# Altium PCB MainPCBV6.PcbDoc (part 2 of 5)
Units mm, origin at the board's own origin, x right, y up, seen from the top; angles counter-clockwise.
Board outline 176 x 144.01 mm, 2 copper layers (Top Layer, Bottom Layer); 220 components, 240 nets, 911 pads, 254 vias.
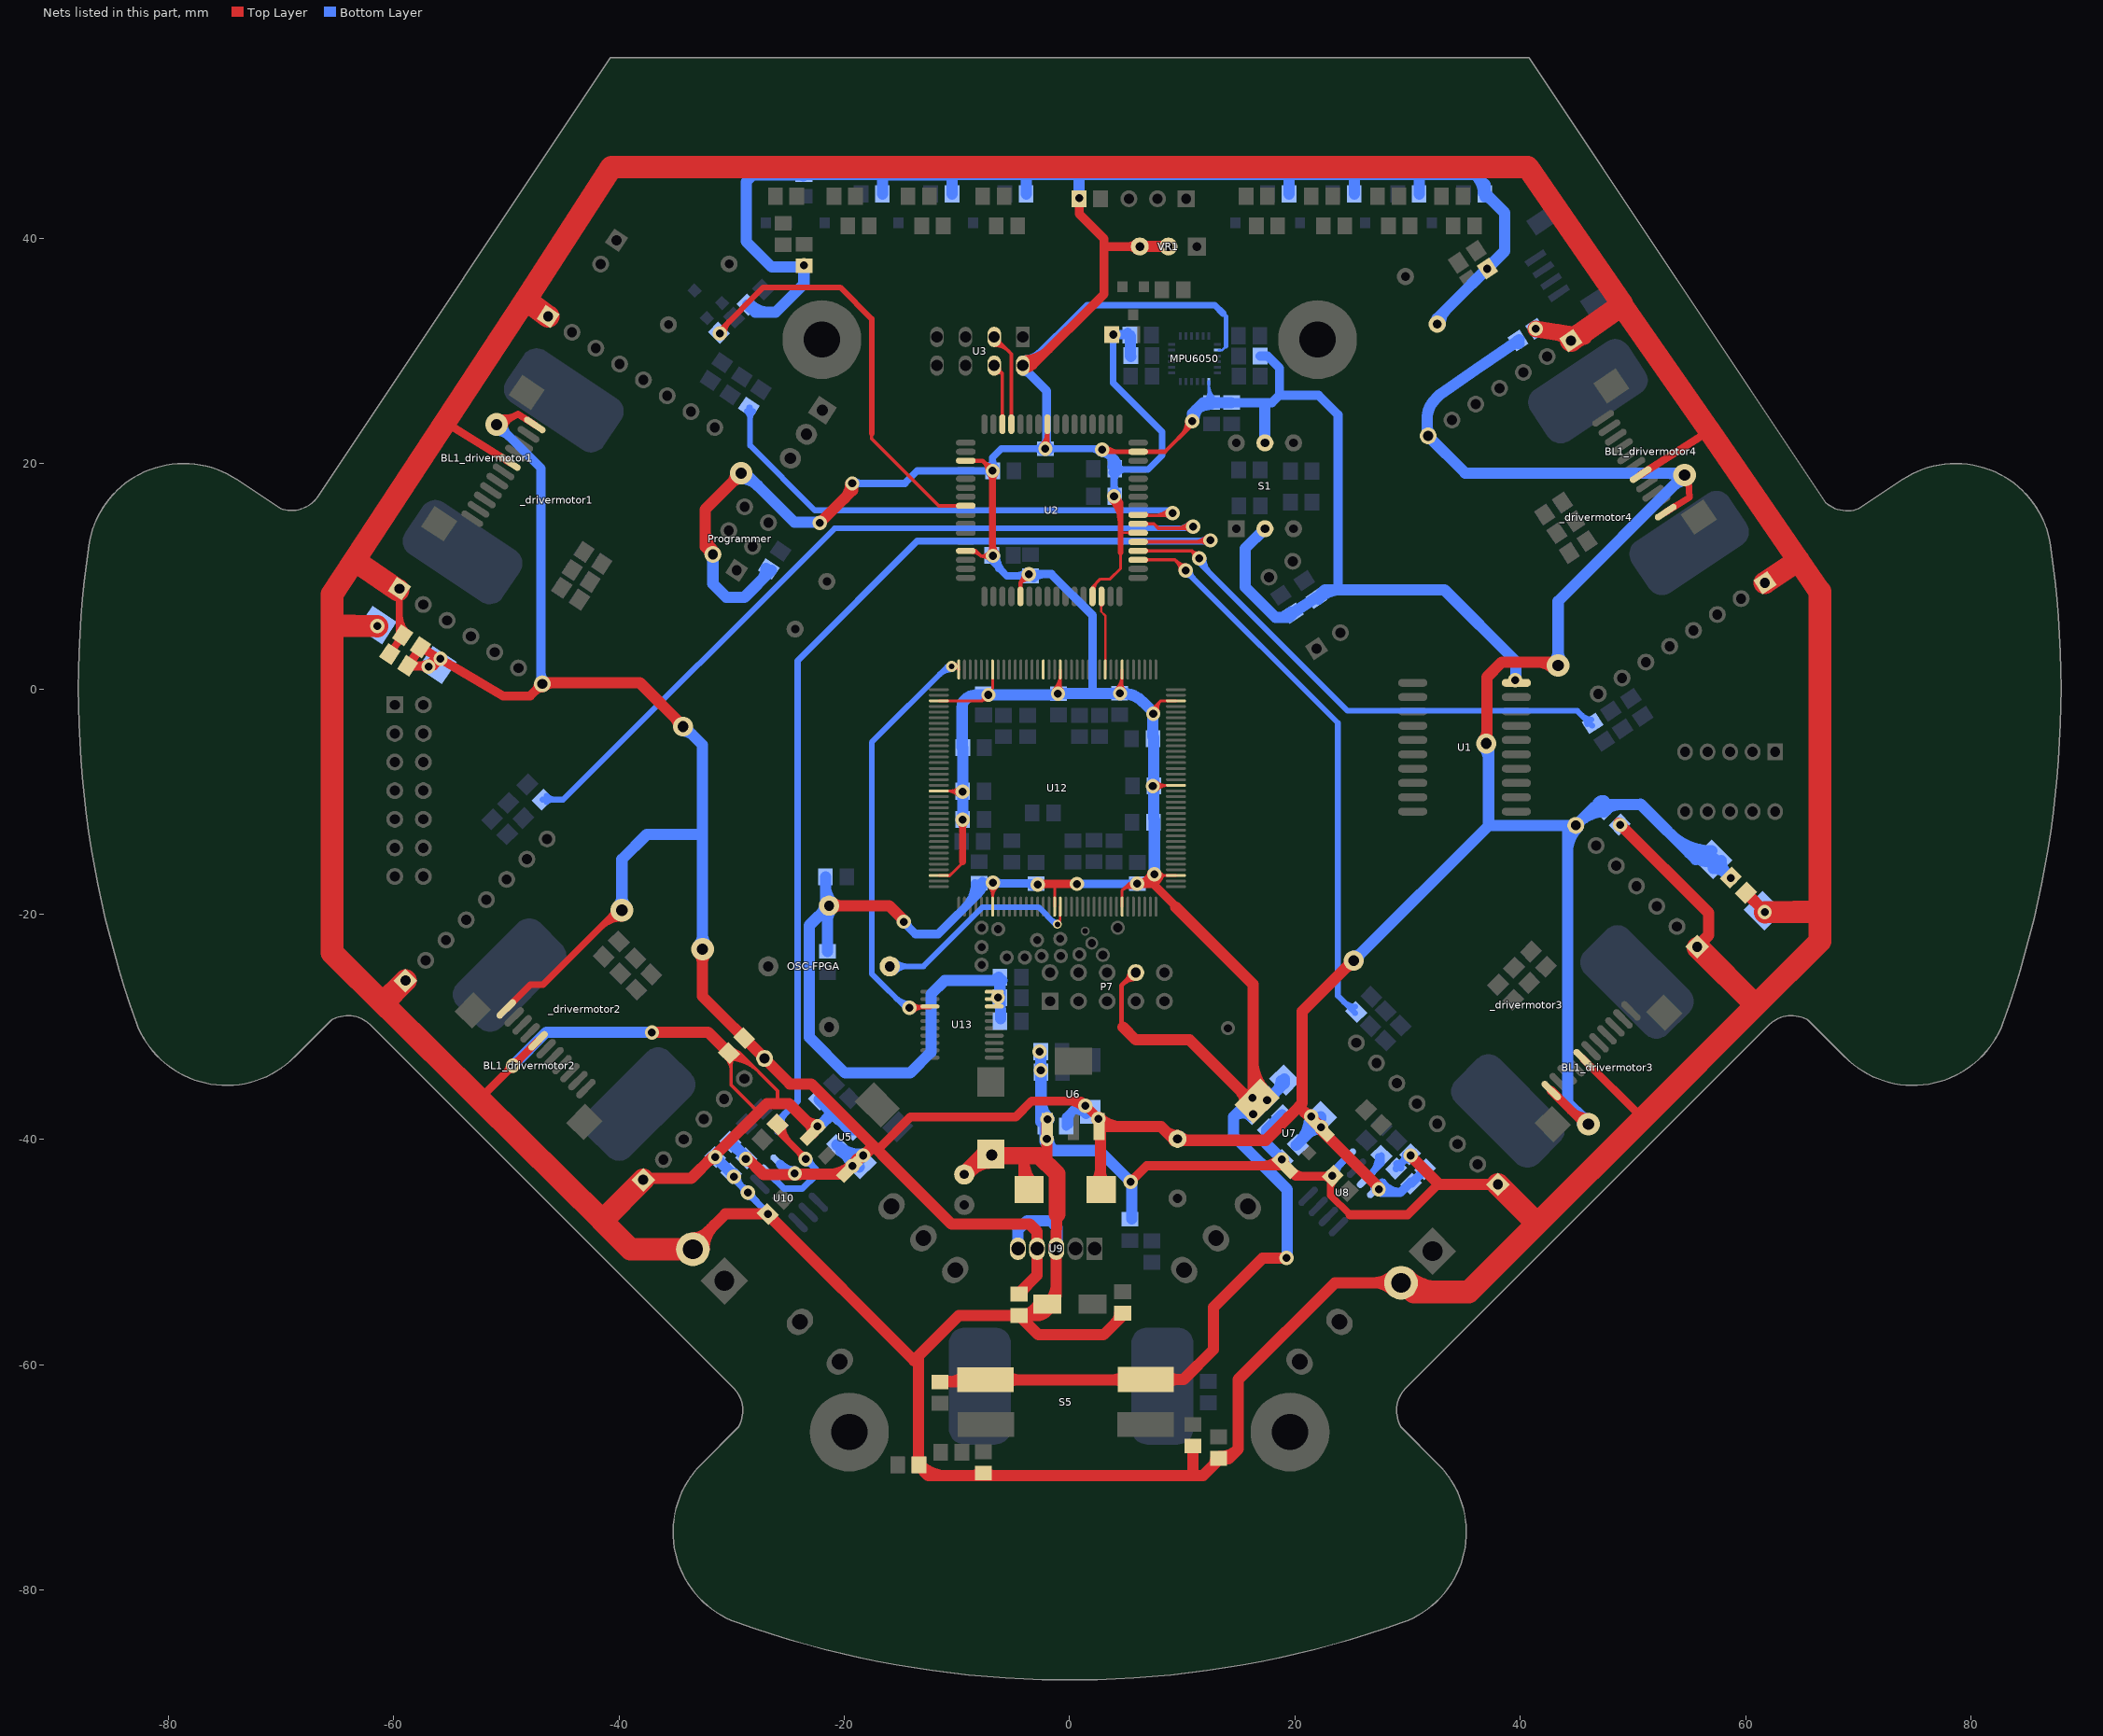
[diagram p2: the nets of this part, all layers, seen from the top]

## Via types
v1: diameter 1.27, hole 0.711, Top Layer to Bottom Layer, 214 vias
v2: diameter 1, hole 0.5, Top Layer to Bottom Layer, 17 vias
v3: diameter 2, hole 1, Top Layer to Bottom Layer, 11 vias
v4: diameter 0.8, hole 0.5, Top Layer to Bottom Layer, 8 vias
v5: diameter 1.778, hole 0.965, Top Layer to Bottom Layer, 3 vias
v6: diameter 0.75, hole 0.5, Top Layer to Bottom Layer, 1 vias

## Nets (pads, with @x,y where several pads share a name; then routed paths per layer and width w, separated by ;. In a path a pad name is that pad's centre, name@x,y a point inside that pad or via, vN(x,y) a via of type N, cw(c..) or ccw(c..) an arc to the next point about the centre after c; other vN are vias at no path point) (continued)
3.3V: C3.2 C18.2 C19.2 C27.2 C29.1 C32.2 C33.1 C39.2 C40.2 C41.2 C42.2 C43.2 C44.2 C45.2 C46.2 C47.2 C48.2 C49.2 C50.2 C56.2 C57.2 C58.2 C101.2 C102.2 C103.2 C104.2 C105.2 C106.2 D6.1 MPU6050.8 MPU6050.13 OSC-FPGA.4 P7.8 Programmer.2 R2.1 R7.1 R14.1 R15.1 R17_LED1.2 R17_LED2.2 R17_LED3.2 R17_LED4.2 R17_LED5.2 R17_LED6.2 R17_LED7.2 R24.1 R25.1 R27.1 R28.2 R30.2 R31.2 R32.2 R33.2 S1.2 S1.5 S2.2 S5.2 U1.20 U2.6 U2.15 U2.25 U2.35 U2.45 U2.53 U2.61 U3.2 U7.4 U12.3 U12.19 U12.34 U12.43 U12.54 U12.66 U12.75 U12.91 U12.106 U12.115 U12.126 U12.138 U13.18 U13.19 U13.20 VR1.2 VR1.3 | length 812.8
  Top Layer w0.2: 4.512,13.767 4.594,13.85 U2.6@6.075,13.85 ; U2.6@5.351,13.726 ccw(c5.053,13.427) 5.053,13.85 ccw(c5.053,14.272) U2.6@5.351,13.973
  Top Layer w0.254: U12.106@-11.617,-16.564 -10.62,-16.564 ; U12.91@-11.617,-9.064 -9.59,-9.064 v1(-9.51,-9.144) ; U12.75@-11.617,-1.064 -7.769,-1.064 ; U12.91@-10.93,-9.064 cw(c-10.93,-10.564) v1@-9.869,-9.503 ; U12.106@-10.855,-16.565 ccw(c-10.738,-16.446) -10.62,-16.564 ; U12.106@-10.853,-16.566 ccw(c-10.853,-16.008) -10.459,-16.402 ; -10.543,-9.064 ccw(c-10.543,-8.111) v1@-9.869,-8.785 ; -10.317,-9.064 cw(c-10.317,-9.951) v1@-9.689,-9.324 ; -9.51,-15.357 -9.461,-15.405 -10.62,-16.564 ; v1@-7.691,-0.708 cw(c-8.009,-0.824) -7.769,-1.064 ; v1@-7.62,-0.914 -7.769,-1.064 ; v1@-7.419,-0.998 ccw(c-7.546,-1.287) -7.769,-1.064 ; v1@-7.166,-17.58 cw(c-7.949,-18.363) -6.842,-18.363 ; U12.115@-6.842,-19.339 v1@-6.842,-17.393 ; U12.115@-6.842,-18.532 cw(c-5.496,-18.532) v1@-6.448,-17.58 ; -6.842,-17.919 cw(c-6.109,-17.919) v1@-6.628,-17.401 ; -6.842,0.041 U12.66@-6.842,1.711 ; v1@-1.401,-0.062 ccw(c-2.758,1.295) U12.54@-0.838,1.295 ; U12.126@-1.342,-19.339 -1.342,-17.38 cw(c-1.27,-17.38) -1.314,-17.323 ; v1@-1.221,-0.242 ccw(c-2.145,0.682) -0.838,0.682 ; v1(-1.041,-0.422) -0.95,-0.422 -0.838,-0.533 -0.838,1.707 U12.54@-0.842,1.711 ; -0.838,0.314 ccw(c-0.306,0.314) v1@-0.682,-0.062 ; U2.61@2.025,8.2 2.025,9.061 2.718,9.754 3.594,9.754 4.512,10.672 4.512,12.09 ; U2.61@2.173,8.8 cw(c3.162,8.8) 2.463,9.498 ; v1@4.111,-0.047 ccw(c2.792,1.272) U12.43@4.658,1.272 ; v1@4.291,-0.227 ccw(c3.405,0.659) 4.658,0.659 ; U12.138@4.658,-19.339 4.658,-17.882 4.674,-17.882 ; v1@4.658,-0.336 U12.43@4.658,1.711 ; 4.658,0.368 ccw(c5.244,0.368) v1@4.83,-0.047 ; 4.906,-17.649 cw(c5.465,-18.209) v1@5.866,-17.527 ; 5.138,-17.417 cw(c5.637,-17.916) 5.994,-17.308 5.984,-17.297 5.258,-17.297 ; v1@5.516,-17.479 ccw(c5.258,-17.572) 5.258,-17.297 ; v1@5.523,-17.118 cw(c5.258,-17.012) 5.258,-17.297 ; v1@5.737,-17.746 ccw(c5.293,-18.501) 4.674,-17.882 ; v1@7.391,-1.753 8.08,-1.064 ; v1@7.405,-16.564 U12.3@9.433,-16.564 ; v1@7.421,-8.564 U12.19@9.433,-8.564 ; v1@7.556,-8.816 cw(c8.164,-9.424) 8.164,-8.564 ; v1@7.652,-2.114 cw(c8.318,-1.843) 7.81,-1.334 ; v1@7.735,-8.995 cw(c8.777,-10.037) U12.19@8.777,-8.564 ; v1@7.735,-8.277 ccw(c8.428,-7.584) 8.428,-8.564 ; v1@7.887,-2.018 cw(c8.703,-1.686) 8.08,-1.064 ; U12.34@9.433,-1.064 8.08,-1.064 ; 4.674,-17.882 5.258,-17.297
  Top Layer w0.305: U2.45@-9.225,12.25 -9.206,12.268 -8.357,12.268 -7.874,11.786 ; U2.45@-8.625,12.127 cw(c-8.625,11.139) -7.926,11.838 ; v1@-7.182,12.115 cw(c-7.874,12.677) -7.874,11.786 ; v1@-7.157,11.478 ccw(c-7.874,10.795) -7.874,11.786 ; v1@-6.833,11.786 -7.874,11.786
  Top Layer w0.381: U2.35@-9.225,20.25 -7.738,20.25 v1(-6.843,19.355) ; v1@-7.287,19.355 ccw(c-8.36,19.355) -7.602,20.114 ccw(c-6.843,20.872) v1@-6.843,19.799 ; U2.53@-4.375,8.2 -4.375,9.443 ; v1@-4.077,10.179 cw(c-5.095,10.163) -4.375,9.443 ; v1@-3.639,9.741 ccw(c-3.655,8.723) -4.375,9.443 ; v1(-3.632,10.185) -4.375,9.443 ; v1@-2.473,21.635 ccw(c-3.677,22.839) U2.25@-1.975,22.839 ; v1(-2.159,21.321) -1.975,21.505 U2.25@-1.975,23.5 ; -1.975,21.949 ccw(c-1.531,21.949) v1@-1.845,21.635 ; v1(2.87,21.234) 3.055,21.05 U2.15@6.075,21.05 8.451,21.05 v1@10.744,23.343 ; v1@3.185,20.92 cw(c3.497,20.607) 3.497,21.05 ; v1@3.185,21.549 ccw(c4.389,22.754) 4.389,21.05 ; 9.897,22.495 ccw(c8.618,23.774) v1@10.427,23.774 ; 10.547,23.146 ccw(c9.919,23.774) v1@10.808,23.774 ; v1@10.947,23.343 v1@10.947,23.698
  Top Layer w0.4: 4.712,-26.226 cw(c5.867,-27.381) P7.8@5.867,-25.747 ; 4.724,-30.023 4.597,-29.896 4.597,-26.34 P7.8@5.791,-25.146 ; 5.018,-25.919 ccw(c4.296,-25.197) P7.8@5.317,-25.197
  Top Layer w0.508: v1@3.668,16.825 cw(c1.63,14.787) 4.512,14.787 ; v1(3.937,17.094) 4.512,16.52 ; v1@3.972,16.715 cw(c4.034,16.042) 4.512,16.52 ; v1@4.027,17.184 cw(c2.856,16.014) 4.512,16.014 ; v1@4.316,17.059 ccw(c4.99,16.998) 4.512,16.52 ; 4.512,12.09 4.512,13.767 4.512,16.52
  Top Layer w0.635: v1@-9.734,-11.832 cw(c-10.276,-12.374) -9.51,-12.374 cw(c-8.743,-12.374) v1@-9.285,-11.832 ; -9.51,-15.357 v1(-9.51,-11.608) ; v1@-7.067,19.13 cw(c-7.609,18.588) -6.843,18.588 cw(c-6.076,18.588) v1@-6.618,19.13 ; v1@-7.032,12.036 ccw(c-7.488,12.492) -6.843,12.492 ; -6.843,12.663 ccw(c-5.955,12.663) v1@-6.583,12.036 ; v1(-6.843,19.355) -6.843,12.04 -7.071,11.811 v1(-6.807,11.811)
  Top Layer w0.75: v1@-3.048,-17.384 -2.987,-17.323 -1.314,-17.323 v1(0.635,-17.323) ; v1@-2.661,-17.557 cw(c-2.094,-18.124) -2.094,-17.323 ; 7.026,-17.308 ccw(c7.026,-16.3) v1@7.985,-16.61 ; v1@7.271,-16.379 cw(c5.994,-15.966) 5.994,-17.308 7.402,-17.308 ; 7.402,-17.316 cw(c8.303,-17.316) v1@7.694,-16.651 ; v1@7.402,-16.561 7.402,-17.308 ; 9.423,-19.38 9.423,-19.329 7.402,-17.308
  Top Layer w0.8: U3.2@-4.166,28.402 ccw(c-4.166,29.763) -3.203,28.801 ; U3.2@-4.166,28.702 -3.302,28.702 3.048,35.052 ; U3.2@-4.166,29.202 ccw(c-4.166,32.494) -1.838,30.166 ; R15.1@0.838,43.409 0.838,42.164 3.048,39.954 3.048,39.192 ; 3.048,35.128 3.048,39.192 ; VR1.3@5.94,38.986 ccw(c5.257,38.303) 5.257,39.268 ccw(c5.257,40.234) VR1.3@5.94,39.551 ; VR1.3@6.198,39.319 VR1.3@6.248,39.268 ; VR1.3@6.223,39.268 3.124,39.268 3.048,39.192
  Top Layer w1: -32.36,14.181 ccw(c-29.421,14.181) Programmer.2@-31.499,12.103 ; Programmer.2@-31.676,11.926 -32.36,12.61 -32.36,15.926 v3@-29.21,19.075 ; -30.031,18.255 ccw(c-30.928,19.152) v3@-29.659,19.152 ; -29.969,18.316 cw(c-29.159,17.506) v3@-29.159,18.652 ; v1(-22.174,14.732) -19.279,17.628 v1@-19.279,18.288 ; OSC-FPGA.4@-21.361,-19.25 -16.031,-19.25 v1@-14.656,-20.625 ; OSC-FPGA.4@-21.079,-19.533 cw(c-20.396,-20.216) -20.396,-19.25 cw(c-20.396,-18.284) OSC-FPGA.4@-21.079,-18.967 ; -19.983,16.923 ccw(c-21.298,18.237) v1@-19.439,18.237 ; C27.2@-11.506,-61.534 -7.813,-61.534 S5.2@-7.772,-61.493 ; C27.2@-11.331,-61.404 ccw(c-10.874,-60.613) -10.638,-61.495 ; C27.2@-10.782,-61.534 ccw(c-10.782,-59.427) S5.2@-9.292,-60.917 ; S5.2@-7.468,-61.341 6.934,-61.341 S5.2@6.96,-61.316 ; S5.2@-5.643,-61.765 cw(c-4.619,-62.79) -4.619,-61.341 cw(c-4.619,-59.892) S5.2@-5.643,-60.917 ; 3.847,-61.341 ccw(c3.847,-59.806) S5.2@4.932,-60.891 ; 3.969,-61.341 cw(c3.969,-62.703) S5.2@4.932,-61.74 ; 4.724,-30.023 5.867,-31.166 10.643,-31.166 U7.4@16.29,-36.813 ; VR1.3@6.248,39.268 VR1.2@8.763,39.268 ; S5.2@6.756,-61.316 S5.2@6.96,-61.316 ; S5.2@8.581,-61.74 cw(c9.605,-62.764) 9.605,-61.316 cw(c9.605,-59.867) S5.2@8.581,-60.891 ; 9.423,-19.38 16.281,-26.238 U7.4@16.281,-35.839 ; 15.034,-35.558 cw(c13.664,-36.928) U7.4@15.602,-36.928 ; 15.22,-35.743 ccw(c16.231,-34.732) U7.4@16.231,-36.162 ; 15.283,-35.806 ccw(c16.302,-34.787) U7.4@16.302,-36.228 ; 15.286,-35.78 ccw(c16.067,-35.203) U7.4@16.211,-36.163 ; 15.368,-35.892 cw(c13.49,-37.77) U7.4@16.146,-37.77 ; 16.281,-33.015 ccw(c20.215,-33.015) U7.4@17.434,-35.797 ; v1@19.177,-50.546 17.12,-50.546 12.776,-54.889 12.776,-58.649 10.109,-61.316 S5.2@6.96,-61.316
  Bottom Layer w0.2: MPU6050.8@13.233,30.074 13.538,30.074 13.868,30.404
  Bottom Layer w0.254: C32.2@12.129,25.78 ccw(c11.637,26.272) 12.332,26.272 ; C32.2@12.332,25.575 MPU6050.13@12.332,27.287 ; 12.332,26.46 ccw(c13.549,26.46) C32.2@12.689,25.6 ; MPU6050.13@12.332,27.074 ccw(c14.162,27.074) C32.2@12.868,25.78 ; C29.1@14.212,25.575 C29.1@14.376,25.41
  Bottom Layer w0.4: v1@-14.884,-20.625 v1@-14.757,-20.752 ; 13.614,33.325 13.868,33.071 13.868,30.404
  Bottom Layer w0.508: C29.1@14.341,25.41 C29.1@14.376,25.41
  Bottom Layer w0.6: U3.2@-4.166,29.302 ccw(c-4.166,31.548) -2.578,29.96 ; U3.2@-3.835,28.702 1.524,34.061 12.878,34.061 13.614,33.325 ; v1@3.624,31.208 cw(c3.052,30.636) 3.861,30.636 cw(c4.67,30.636) v1@4.098,31.208 ; v1(3.861,31.445) 3.861,27.153 8.204,22.809 8.204,20.726 6.96,19.482 C105.2@4.14,19.482 ; C105.2@4.245,19.185 cw(c4.962,18.469) 4.962,19.482 ; C105.2@4.245,19.68 ccw(c4.724,20.159) 4.724,19.482
  Bottom Layer w0.635: v1@-19.355,18.237 v1(-19.304,18.237) -14.63,18.237 -13.513,19.355 v1(-6.843,19.355) -6.843,20.538 -6.06,21.321 v1(-2.159,21.321) 2.758,21.321 v1@2.921,21.158 ; v1@-19.079,18.013 cw(c-18.537,17.471) -18.537,18.237 cw(c-18.537,19.004) v1@-19.079,18.462 ; C106.2@-7.081,11.538 -5.566,10.023 C102.2@-3.48,10.023 ; C103.2@-7.078,19.12 ccw(c-7.646,18.552) -7.646,19.355 ccw(c-7.646,20.158) C103.2@-7.078,19.59 ; C103.2@-7.078,19.69 ccw(c-7.646,20.258) -6.843,20.258 ccw(c-6.04,20.258) C103.2@-6.608,19.69 ; C103.2@-7.067,19.13 ccw(c-7.609,18.588) -7.609,19.355 ccw(c-7.609,20.121) -7.067,19.579 ccw(c-7.609,20.121) -6.843,20.121 ccw(c-6.076,20.121) C103.2@-6.618,19.579 ; C106.2@-6.966,11.536 cw(c-7.68,10.299) -6.3,10.669 ; C106.2@-6.587,11.736 ccw(c-4.914,11.736) -6.097,10.553 ; C106.2@-6.49,11.811 ccw(c-4.403,11.811) -5.879,10.335 ; -4.791,10.023 ccw(c-4.791,11.344) C102.2@-3.857,10.41 ; C102.2@-3.815,9.788 ccw(c-4.383,9.22) -4.383,10.023 ccw(c-4.383,10.826) C102.2@-3.815,10.258 ; C104.2@-2.494,21.086 ccw(c-3.062,20.518) -3.062,21.321 ccw(c-3.062,22.124) C104.2@-2.494,21.556 ; C104.2@-2.384,21.096 ccw(c-2.926,20.554) -2.926,21.321 ccw(c-2.926,22.087) C104.2@-2.384,21.545 ; C104.2@-1.934,21.096 cw(c-1.392,20.554) -1.392,21.321 cw(c-1.392,22.087) C104.2@-1.934,21.545 ; C104.2@-1.824,21.086 cw(c-1.256,20.518) -1.256,21.321 cw(c-1.256,22.124) C104.2@-1.824,21.556 ; 1.895,21.321 cw(c1.895,20.259) v1@2.646,21.01 ; v1@2.84,20.918 cw(c2.733,19.777) 3.725,20.35 ; v1@2.87,21.321 v1@3.165,21.321 ; v1@2.886,20.917 cw(c2.957,19.446) 3.998,20.488 ; C105.2@3.671,19.693 ccw(c1.869,20.025) v1@3.165,21.321 ; C101.2@3.712,17.319 ccw(c3.17,17.861) 3.937,17.861 ccw(c4.704,17.861) C101.2@4.162,17.319 ; C101.2@3.763,17.429 ccw(c3.343,17.85) 3.937,17.85 ; C105.2@3.763,19.197 cw(c3.343,18.777) 3.937,18.777 ; C105.2@3.763,19.868 ccw(c3.195,20.435) 3.998,20.435 ccw(c4.801,20.435) C105.2@4.233,19.868 ; v1(3.937,17.094) C105.2@3.937,19.472 ; 3.937,18.144 ccw(c4.948,18.144) C101.2@4.233,17.429 ; 3.937,18.483 cw(c4.948,18.483) C105.2@4.233,19.197 ; C105.2@3.998,19.533 3.998,20.488 ; 4.019,20.466 cw(c3.312,19.759) C105.2@4.295,19.578 ; v1@3.165,21.321 3.998,20.488
  Bottom Layer w0.75: v1@-14.732,-20.726 -13.691,-21.768 -11.684,-21.768 -8.026,-18.11 C44.2@-8.026,-17.282 ; v1@-14.472,-20.676 ccw(c-13.722,-20.676) -14.252,-21.206 ; C41.2@-9.51,-5.234 C41.2@-9.51,-5.207 ; -9.27,-19.354 ccw(c-11.367,-17.257) C44.2@-8.401,-17.257 ; C44.2@-8.221,-17.451 cw(c-8.69,-17.921) -8.026,-17.921 cw(c-7.362,-17.921) C44.2@-7.832,-17.451 ; C44.2@-8.026,-17.257 C44.2@-8.026,-17.282 ; -7.99,-18.073 ccw(c-8.806,-17.257) C44.2@-7.651,-17.257 ; C44.2@-7.732,-17.062 ccw(c-7.201,-16.532) v1@-7.201,-17.282 ; C44.2@-7.582,-17.282 ccw(c-7.582,-16.446) v1@-6.991,-17.037 ; v1@-6.807,-17.282 C44.2@-8.026,-17.282 ; v1@-6.731,-17.282 C48.2@-3.048,-17.282 ; v1@-6.623,-17.037 ccw(c-6.032,-16.446) -6.032,-17.282 ; -3.822,-17.282 cw(c-3.822,-18.033) C48.2@-3.292,-17.502 ; C48.2@-3.693,-17.282 cw(c-3.693,-18.222) C48.2@-3.029,-17.557 ; C102.2@-3.454,10.185 -1.626,10.185 2.032,6.528 2.032,-0.396 ; C102.2@-3.185,9.828 cw(c-2.323,8.966) -2.323,10.185 ; v1(0.635,-17.323) 5.979,-17.323 v1(5.994,-17.308) ; 5.194,-17.323 ccw(c5.194,-16.607) C39.2@5.7,-17.113 ; C39.2@5.33,-17.323 ccw(c5.33,-16.643) C39.2@5.811,-17.124 ; v1@7.402,-16.561 v1@7.402,-16.459
  Bottom Layer w0.8: U3.2@-4.166,28.202 cw(c-4.166,27.302) -3.529,27.938 ; U3.2@-3.835,28.702 U3.2@-4.166,28.702 -4.166,28.575 -2.057,26.467 C104.2@-2.057,21.361 ; C104.2@-2.325,21.487 ccw(c-2.972,22.133) -2.057,22.133 ; v1(3.861,31.445) 5.41,31.445 R25.1@5.461,31.394 ; 4.627,31.445 ccw(c4.627,32.217) R25.1@5.172,31.671 ; C32.2@12.471,25.4 14.351,25.4 17.958,25.4 18.618,26.06 ; R27.1@16.9,29.544 17.573,29.544 18.618,28.499 18.618,26.06 ; 23.825,8.839 23.825,24.333 22.098,26.06 18.618,26.06
  Bottom Layer w1: Programmer.2@-31.676,11.926 -31.676,9.324 -30.48,8.128 -28.88,8.128 R7.1@-26.467,10.541 ; v3@-29.159,18.652 cw(c-29.159,16.586) -27.699,18.047 ; v3(-29.159,19.152) -28.804,19.152 -24.435,14.783 v1@-22.174,14.783 ; R2.1@-28.586,34.101 -27.912,33.426 -26.111,33.426 -23.597,35.941 v1@-23.597,37.516 ; R2.1@-28.41,34.136 ccw(c-26.696,35.85) -26.696,33.426 ; -27.396,9.611 ccw(c-28.48,10.695) R7.1@-26.948,10.695 ; -24.352,37.44 ccw(c-24.352,38.373) v1@-23.692,37.713 ; R31.2@-23.673,45.542 -23.571,45.644 -16.662,45.644 ; v1@-23.622,37.44 -26.441,37.44 -28.727,39.726 -28.727,45.009 -28.108,45.629 R31.2@-23.597,45.629 ; OSC-FPGA.4@-21.761,-19.25 cw(c-22.727,-19.25) -22.044,-19.933 cw(c-21.361,-20.616) OSC-FPGA.4@-21.361,-19.65 ; OSC-FPGA.4@-21.676,-18.786 R33.2@-21.676,-16.688 ; -21.676,-17.524 ccw(c-19.635,-17.524) OSC-FPGA.4@-21.079,-18.967 ; C33.1@-21.514,-23.307 -21.514,-19.456 OSC-FPGA.4@-21.361,-19.304 ; -21.514,-20.583 cw(c-20.028,-20.583) OSC-FPGA.4@-21.079,-19.533 ; OSC-FPGA.4@-21.361,-19.25 -23.114,-21.002 -23.114,-30.937 -19.939,-34.112 -14.173,-34.112 -12.319,-32.258 -12.319,-27.127 -11.1,-25.908 C57.2@-6.194,-25.908 ; OSC-FPGA.4@-21.287,-19.175 OSC-FPGA.4@-21.184,-19.279 ; R17_LED1.2@-16.627,43.942 -16.627,45.634 -10.196,45.634 -10.185,45.644 ; R17_LED2.2@-10.442,43.942 -10.442,45.591 -10.414,45.618 ; -10.389,45.618 -10.363,45.644 -3.866,45.644 ; C42.2@-9.525,-11.633 ccw(c-9.648,-11.511) -9.51,-11.616 ccw(c-9.648,-11.511) -9.474,-11.511 -9.474,-5.366 ccw(c-9.734,-5.366) -9.51,-5.234 ccw(c-9.734,-5.366) -9.55,-5.182 -9.55,-1.614 cw(c-8.596,-1.614) -9.51,-1.339 cw(c-8.596,-1.614) -9.271,-0.94 cw(c-8.351,-1.86) -8.351,-0.559 -7.417,-0.559 cw(c-7.355,-0.62) -7.355,-0.533 v1(-7.214,-0.533) -1.067,-0.533 cw(c-0.736,-0.865) -0.888,-0.422 cw(c-0.736,-0.865) -0.736,-0.396 2.032,-0.396 C40.2@4.42,-0.396 ; -7.055,-25.908 ccw(c-7.055,-24.846) C57.2@-6.304,-25.597 ; C58.2@-6.472,-27.312 ccw(c-7.201,-26.604) -6.184,-26.589 ; C58.2@-6.47,-27.503 cw(c-7.178,-28.232) -6.162,-28.218 ; C56.2@-6.147,-29.286 -6.173,-27.432 -6.173,-27.404 -6.194,-25.91 C57.2@-6.194,-25.908 ; C57.2@-6.02,-25.908 C57.2@-6.194,-25.908 ; R17_LED3.2@-3.866,43.942 -3.866,45.644 ; v1@0.762,43.485 v1@0.787,43.459 ; v1@0.813,43.561 0.813,45.644 ; C40.2@4.42,-0.406 v1(4.47,-0.406) 4.688,-0.406 cw(c4.688,-2.946) 6.484,-1.15 7.518,-2.184 7.366,-2.337 7.366,-4.216 7.442,-4.293 7.442,-11.532 7.544,-11.633 7.518,-11.659 v1(7.518,-16.459) ; R25.1@5.392,31.302 5.392,29.558 R24.1@5.436,29.515 ; v1@10.897,23.774 10.897,24.435 11.872,25.41 C32.2@12.573,25.41 ; v1@11.006,23.774 cw(c12.865,23.774) 11.551,25.089 ; 11.173,24.711 cw(c12.498,23.386) C32.2@12.498,25.26 ; C32.2@12.598,25.41 14.341,25.41 C29.1@14.351,25.4 ; 14.625,-37.902 cw(c17.444,-40.721) C18.2@17.444,-36.735 ; 14.86,-37.733 cw(c15.448,-38.552) C19.2@16.183,-37.862 ; 14.937,-37.729 ccw(c13.746,-35.589) v1@16.101,-36.26 ; 15.288,-37.239 cw(c16.05,-38.001) C19.2@16.756,-37.187 ; 15.504,-37.045 ccw(c15.72,-34.399) C18.2@17.439,-36.422 ; 15.787,-37.068 cw(c16.287,-37.765) 16.912,-37.178 ; C19.2@16.101,-37.942 ccw(c15.345,-38.815) 14.529,-37.998 ; C19.2@16.201,-37.878 ccw(c15.434,-38.904) 14.529,-37.998 ; v1(16.231,-36.297) 14.529,-37.998 ; C19.2@16.27,-37.758 17.478,-36.551 17.526,-36.551 19.05,-35.027 D6.1@19.05,-34.646 ; v1@16.332,-36.195 cw(c17.444,-37.307) C18.2@17.444,-35.735 ; v1@16.335,-36.212 ccw(c17.42,-35.332) C18.2@17.58,-36.719 ; 16.836,-36.897 ccw(c16.592,-35.986) C18.2@17.409,-36.458 ; 17.323,25.222 17.331,25.214 S1.5@17.331,21.832 ; S1.2@17.331,14.212 15.57,12.451 15.57,9.042 18.288,6.325 19.431,6.325 R28.2@19.888,6.782 ; 18.407,-35.669 ccw(c17.547,-34.809) D6.1@18.763,-34.809 ; 18.52,6.325 ccw(c18.52,7.874) R28.2@19.616,6.779 ; v1@19.329,-50.444 19.304,-50.419 19.304,-44.45 14.529,-39.675 14.529,-37.998 ; R17_LED7.2@19.467,43.942 19.467,45.644 ; R28.2@19.806,6.728 21.858,8.07 R30.2@21.869,8.077 ; R30.2@21.888,8.023 22.653,8.788 33.274,8.788 39.624,2.438 v1@39.624,0.711 ; R30.2@22.078,7.973 cw(c24.047,6.004) 24.047,8.788 ; R17_LED6.2@25.258,43.942 25.258,45.527 25.273,45.542 ; R17_LED5.2@31.024,43.942 31.024,45.502 31.039,45.517 ; 31.191,45.618 31.166,45.644 ; S2.2@32.626,32.38 32.626,32.88 38.608,38.862 38.608,42.266 R17_LED4.2@36.83,44.044 ; S2.2@32.888,32.38 cw(c34.727,32.38) 33.426,33.68 ; 36.095,45.541 cw(c34.596,44.042) R17_LED4.2@36.716,44.042 ; R17_LED4.2@36.866,43.692 cw(c36.866,42.929) R17_LED4.2@37.405,43.469 ; R17_LED4.2@36.866,43.942 36.866,44.77 35.992,45.644 31.166,45.644 ; -3.866,45.644 19.467,45.644 ; 19.467,45.644 31.166,45.644
  other v1: 19.253,-50.521 16.281,-37.77 17.526,-36.525 -6.375,-27.407 -14.732,-20.676 -2.845,-17.374 -6.807,-17.221 7.376,-8.636 7.417,-2.21 39.548,0.762 10.871,23.774 37.059,37.287 -23.597,37.617 0.838,43.561
5V: _drivermotor1.9 _drivermotor2.9 _drivermotor3.9 _drivermotor4.9 BL1_drivermotor1.11 BL1_drivermotor2.11 BL1_drivermotor3.11 BL1_drivermotor4.11 C1.2 C2.1 C4_drivermotor1.2 C4_drivermotor2.2 C4_drivermotor3.2 C4_drivermotor4.2 C5.2 C6.2 C11.2 C14.2 C17.2 C20.1 C24.1 C25.2 C26.1 C61.2 C62.1 D2.2 D4.2 D6.2 L1.2 U5.3 U6.3 U7.3 U8.8 U9.4 U10.8 | length 515.7
  Top Layer w0.6: v3@-50.775,23.47 -48.971,24.384 BL1_drivermotor1.11@-47.487,23.426 ; v3@-50.659,24.135 ccw(c-50.084,25.89) -49.249,24.243 ; v3@-50.211,23.252 cw(c-48.754,22.775) -49.447,24.143 ; BL1_drivermotor2.11@-50.02,-28.42 -47.864,-26.264 -46.761,-26.264 v3@-40.107,-19.609 ; -41.64,-21.142 cw(c-39.751,-23.031) v3@-39.751,-20.36 ; -40.659,-20.161 ccw(c-41.16,-19.66) v3@-40.451,-19.66 ; BL1_drivermotor4.11@52.907,15.69 55.016,16.993 54.94,18.237 v3(54.585,18.974) v3@54.534,19.075 ; v3@54.518,18.899 cw(c53.657,17.926) 54.954,18.005
  Top Layer w0.8: C61.2@-58.773,2.038 -56.458,2.038 -55.931,2.565 cw(c-56.789,3.423) v1@-56.9,2.215 ; C61.2@-58.768,2.366 ccw(c-58.926,3.124) -58.278,2.7 ; C61.2@-58.699,2.057 C4_drivermotor1.2@-57.63,3.689 -55.877,2.657 -54.214,1.676 -54.003,1.552 -50.292,-0.635 -47.899,-0.635 _drivermotor1.9@-46.824,0.44 ; C61.2@-58.54,2.298 ccw(c-57.913,2.926) -57.913,2.038 ; -57.939,2.038 ccw(c-57.939,4.752) v1@-56.021,2.833 ; -57.627,2.038 cw(c-57.627,1.276) v1@-57.088,1.815 ; C4_drivermotor1.2@-57.332,3.835 ccw(c-56.418,4.071) -56.897,3.258 ; v1@-56.691,1.936 cw(c-55.449,1.693) v1@-56.155,2.743 ; _drivermotor1.9@-47.174,0.44 cw(c-48.019,0.44) -47.422,-0.158 cw(c-46.824,-0.755) _drivermotor1.9@-46.824,0.09 ; -16.84,-40.716 -14.122,-37.998 -4.775,-37.998 -3.378,-36.601 0.991,-36.601 v1(1.397,-37.008) U6.3@2.553,-38.163 ; -0.151,-36.601 cw(c-0.151,-38.556) v1@1.231,-37.174 ; BL1_drivermotor3.11@42.746,-35.669 45.583,-38.506 v3@46.253,-38.506 ; 44.489,-37.412 ccw(c46.05,-35.851) v3@46.05,-38.059
  Top Layer w1: _drivermotor1.9@-46.939,0.584 -46.939,0.533 -38.151,0.533 v5@-34.214,-3.404 ; _drivermotor1.9@-46.648,0.263 cw(c-45.995,-0.389) -45.995,0.533 ; -35.015,-2.602 cw(c-35.766,-3.353) v5@-34.704,-3.353 ; v3@-32.942,-23.468 cw(c-33.734,-24.26) -32.614,-24.26 ; -32.614,-24.382 cw(c-31.32,-24.382) v3@-32.235,-23.468 ; v3@-32.614,-23.114 -32.614,-27.282 _drivermotor2.9@-27.082,-32.814 ; v1@-28.753,-41.867 cw(c-28.753,-42.622) -28.219,-42.088 ; v1@-28.689,-41.618 -27.178,-43.129 v1@-23.952,-43.129 ; _drivermotor2.9@-27.203,-32.715 -24.841,-35.077 -22.936,-35.077 -10.49,-47.523 -3.556,-47.523 -2.894,-48.186 U9.4@-2.894,-49.708 -2.894,-52.068 C25.2@-4.521,-53.696 ; v1@-23.952,-43.104 -20.015,-43.104 -18.491,-41.58 v1@-18.435,-41.58 ; -21.383,-43.104 ccw(c-21.383,-40.263) U5.3@-19.374,-42.272 ; U5.3@-19.055,-42.18 cw(c-18.435,-42.201) v1@-18.435,-41.58 ; -17.604,-40.764 v1@-18.435,-41.58 ; C25.2@-4.246,-53.736 cw(c-3.483,-53.736) C25.2@-4.022,-53.197 ; C26.1@2.199,-43.955 ccw(c0.945,-42.702) 2.718,-42.702 ; U6.3@2.445,-38.272 cw(c1.785,-38.931) U6.3@2.718,-38.931 ; U6.3@2.449,-38.276 cw(c1.884,-38.889) U6.3@2.718,-38.889 ; U6.3@2.635,-38.081 ccw(c4.532,-36.184) 4.532,-38.866 ; C26.1@2.718,-44.501 2.718,-38.866 8.107,-38.866 L1.2@9.068,-39.827 ; 2.718,-42.818 ccw(c4.325,-42.818) C26.1@3.189,-43.955 ; 8.416,-39.175 ccw(c9.576,-38.016) L1.2@9.576,-39.656 ; L1.2@9.246,-40.081 17.399,-40.081 20.168,-37.313 ; L1.2@9.788,-39.744 ccw(c10.603,-38.929) 10.603,-40.081 ; 19.406,-38.049 20.358,-37.097 ; 20.86,-37.599 ccw(c21.438,-37.022) v1@21.438,-37.838 ; v1@21.247,-37.91 U7.3@22.301,-38.964 ; v1@21.573,-37.973 ccw(c22.389,-37.973) U7.3@21.812,-38.55 ; U7.3@21.615,-38.21 ccw(c22.68,-37.595) U7.3@22.362,-38.782 ; U7.3@22.348,-39.085 22.348,-39.188 27.381,-44.221 v1@27.381,-44.323 ; U7.3@22.454,-38.964 U7.3@22.301,-38.964 ; U7.3@22.462,-38.913 ccw(c23.401,-38.913) U7.3@22.737,-39.577 ; U7.3@22.555,-39.218 U7.3@22.301,-38.964 ; 24.446,-24.83 cw(c25.197,-25.581) v5@25.197,-24.519 ; v5@25.171,-24.105 20.65,-28.626 20.65,-36.805 20.358,-37.097 ; v5@36.707,-4.576 ccw(c35.921,-3.79) 37.033,-3.79 ; v5@37.033,-4.978 37.033,1.041 38.354,2.362 43.332,2.362 43.358,2.337 v3(43.358,2.083) ; 41.476,2.362 cw(c41.476,0.201) v3@43.004,1.729 ; 20.358,-37.097 22.225,-38.964 U7.3@22.301,-38.964
  Bottom Layer w0.8: v3@-50.876,22.87 cw(c-50.876,21.298) -49.765,22.409 ; v3@-50.876,23.52 -46.939,19.583 -46.939,0.555 _drivermotor1.9@-46.824,0.44 ; v3@-50.276,23.47 ccw(c-48.95,23.47) -49.888,22.532 ; -46.939,1.562 ccw(c-45.702,1.562) _drivermotor1.9@-46.577,0.687 ; U10.8@-25.709,-42.194 -24.799,-43.104 v1@-24.435,-43.104 ; U10.8@-25.605,-42.297 ccw(c-24.409,-41.102) v1@-24.409,-42.793 ; U10.8@-25.214,-42.83 ccw(c-24.553,-42.169) v1@-24.553,-43.104 ; C14.2@-0.303,-38.83 -0.303,-38.022 0.33,-37.389 ; C14.2@-0.058,-38.68 cw(c1.336,-38.395) 0.33,-37.389 ; 0.469,-37.389 cw(c0.469,-38.776) D4.2@1.45,-37.795 ; 0.638,-37.389 ccw(c0.638,-36.241) D4.2@1.45,-37.053 ; D4.2@1.193,-36.89 cw(c0.33,-36.392) 0.33,-37.389 ; D4.2@1.397,-37.389 0.33,-37.389 ; U8.8@27.077,-44.295 ccw(c27.85,-43.769) v1@27.85,-44.704 ; U8.8@27.255,-44.354 27.605,-44.704 29.362,-44.704 ; U8.8@27.598,-44.258 ccw(c28.674,-43.183) 28.674,-44.704 ; U8.8@27.738,-43.845 ccw(c29.362,-42.739) 29.362,-44.704 ; C20.1@30.277,-43.79 29.362,-44.704 ; C20.1@30.364,-43.877 31.558,-42.683 C5.2@31.558,-42.658
  Bottom Layer w1: v3@-40.105,-19.306 ccw(c-40.958,-18.452) -39.751,-18.452 ccw(c-38.544,-18.452) v3@-39.397,-19.306 ; v3(-39.751,-19.66) -39.751,-15.138 -37.541,-12.929 -32.639,-12.929 ; v5@-34.315,-3.742 cw(c-34.315,-4.926) -33.478,-4.089 ; v5@-34.277,-3.289 -32.588,-4.978 v3(-32.588,-23.114) ; v3@-32.942,-22.76 ccw(c-33.795,-21.907) -32.588,-21.907 ccw(c-31.381,-21.907) v3@-32.235,-22.76 ; C6.2@-30.113,-40.222 -28.702,-41.633 C24.1@-28.702,-41.681 ; C11.2@-20.662,-40.499 C11.2@-20.639,-40.499 ; C11.2@-20.312,-41.053 cw(c-21.059,-42.527) D2.2@-19.413,-42.379 ; -19.868,-41.27 cw(c-20.966,-42.367) D2.2@-19.414,-42.367 ; -19.851,-41.287 ccw(c-18.606,-40.042) D2.2@-18.606,-41.803 ; D2.2@-18.694,-42.443 C11.2@-20.639,-40.499 ; D2.2@-18.354,-41.293 cw(c-18.676,-38.536) C11.2@-20.639,-40.499 ; C17.2@20.104,-40.526 D6.2@22.225,-38.405 ; C17.2@20.345,-40.285 ccw(c18.033,-37.973) D6.2@21.303,-37.973 ; 21.055,-39.574 cw(c22.327,-40.845) D6.2@22.327,-39.048 ; 21.518,-39.158 cw(c21.952,-39.463) D6.2@22.251,-39.024 ; 21.626,-39.004 ccw(c20.685,-38.062) D6.2@22.016,-38.062 ; D6.2@22.052,-38.578 ccw(c21.447,-37.973) D6.2@22.303,-37.973 ; v5(25.197,-24.13) 37.173,-12.154 ; v5@25.197,-23.741 ccw(c25.197,-22.802) 25.861,-23.466 ccw(c26.525,-24.13) v5@25.586,-24.13 ; _drivermotor4.9@31.648,22.504 _drivermotor4.9@31.775,22.377 ; _drivermotor4.9@31.725,22.581 31.725,23.941 cw(c34.265,23.941) 32.469,25.738 32.893,26.162 36.06,28.342 39.755,30.886 C4_drivermotor4.2@39.903,30.988 ; 31.725,23.264 ccw(c32.623,23.264) _drivermotor4.9@31.988,22.629 ; _drivermotor4.9@31.811,22.581 _drivermotor4.9@31.811,22.452 35.111,19.152 54.737,19.152 43.358,7.772 v3(43.358,2.083) ; v5@36.707,-5.126 cw(c35.553,-6.281) 37.186,-6.281 ; v5@37.186,-5.055 37.186,-12.141 44.196,-12.141 44.196,-36.728 45.669,-38.202 v3@45.669,-38.659 ; C4_drivermotor4.2@39.827,30.658 C4_drivermotor4.2@39.903,30.658 ; v3@43.004,2.436 ccw(c42.151,3.29) 43.358,3.29 ccw(c44.565,3.29) v3@43.711,2.436 ; 44.196,-14.496 cw(c47.305,-14.496) _drivermotor3.9@45.106,-12.298 ; _drivermotor3.9@44.93,-12.121 46.535,-10.516 47.498,-10.516 47.727,-10.287 50.622,-10.287 ; 45.143,-37.675 cw(c44.159,-38.659) v3@45.55,-38.659 ; _drivermotor3.9@45.208,-11.843 cw(c47.416,-14.05) C4_drivermotor3.2@47.416,-10.928 ; 45.327,-37.859 ccw(c46.05,-37.136) v3@46.05,-38.159 ; 46.915,-10.136 cw(c47.416,-10.636) C4_drivermotor3.2@47.416,-9.928 ; C4_drivermotor3.2@47.663,-10.743 cw(c48.764,-11.843) 48.764,-10.287 ; 50.673,-10.236 C2.1@55.575,-15.138 ; 52.948,19.152 cw(c52.948,17.337) v3@54.231,18.62 ; 53.29,-12.854 ccw(c56.99,-9.154) C2.1@56.99,-14.386 ; 53.688,18.102 cw(c54.585,17.205) v3@54.585,18.474 ; 53.749,18.164 ccw(c52.939,18.974) v3@54.085,18.974 ; 54.998,-14.561 ccw(c56.99,-12.568) C2.1@56.99,-15.386 ; C2.1@57.061,-15.138 C2.1@57.277,-15.138 ; C2.1@57.099,-15.265 57.15,-15.265 v1(58.699,-16.815) ; C2.1@57.132,-15.928 cw(c57.132,-17.571) v1@58.293,-16.409 ; C2.1@57.832,-15.228 ccw(c59.568,-15.228) v1@58.34,-16.456 ; 58.181,-16.344 cw(c57.764,-17.065) v1@58.569,-16.85 ; 58.264,-16.323 ccw(c58.935,-15.936) v1@58.734,-16.684
  other v1: 27.432,-44.425 -24.409,-43.028 -19.279,-42.367 -28.753,-41.732 -18.339,-41.427 22.327,-38.913 2.54,-38.176 21.438,-37.973 -56.921,1.981 -55.855,2.667
  other v3: 46.05,-38.659 -50.876,23.47
  other v5: 36.982,-4.851 -34.315,-3.353
AGND: _drivermotor1.8 _drivermotor1.15 _drivermotor2.8 _drivermotor2.15 _drivermotor3.8 _drivermotor3.15 _drivermotor4.8 _drivermotor4.15 Battery1.2 BL1_drivermotor1.7 BL1_drivermotor2.7 BL1_drivermotor3.7 BL1_drivermotor4.7 C1.1 C2.2 C4_drivermotor1.1 C4_drivermotor2.1 C4_drivermotor3.1 C4_drivermotor4.1 C5.1 C6.1 C11.1 C12.1 C13.1 C14.1 C15.1 C16.1 C17.1 C18.1 C19.1 C20.2 C21.2 C22.1 C23.1 C24.2 C25.1 C26.2 C28.2 C61.1 C62.2 D3.2 D5.2 D7.1 D8.2 FB?.2 kick1.2 R20.1 R23.1 U5.1 U6.1 U7.1 U8.5 U9.3 U9.5 U10.5 | length 803.3
  Top Layer w0.3: C4_drivermotor2.1@-30.52,-32.77 cw(c-31.66,-33.909) -30.048,-33.909 ; C4_drivermotor2.1@-30.308,-32.558 cw(c-30.935,-33.185) C4_drivermotor2.1@-30.048,-33.185 ; C4_drivermotor2.1@-30.167,-32.916 cw(c-30.167,-36.447) -27.67,-33.95 ; C4_drivermotor2.1@-30.167,-32.616 cw(c-30.167,-35.423) -28.182,-33.438 ; C4_drivermotor2.1@-30.167,-32.316 cw(c-30.167,-34.399) -28.694,-32.926 ; C4_drivermotor2.1@-30.167,-32.016 cw(c-30.167,-33.374) -29.206,-32.414 ; -30.048,-33.337 cw(c-29.245,-33.337) C4_drivermotor2.1@-29.813,-32.77 ; C4_drivermotor2.1@-29.776,-32.104 ccw(c-29.275,-31.705) -29.275,-32.346 ; C4_drivermotor2.1@-29.713,-32.626 cw(c-29.275,-32.828) -29.275,-32.346 ; -27.61,-37.49 -27.737,-37.49 -30.048,-35.179 -30.048,-32.535 C4_drivermotor2.1@-30.237,-32.346 -29.275,-32.346 ; -25.933,-36.83 -25.933,-35.687 -29.275,-32.346
  Top Layer w0.6: -52.502,-36.398 -52.426,-36.398 ; 50.868,-38.134 50.978,-38.244 50.978,-38.278
  Top Layer w0.635: C61.1@-60.354,3.503 ccw(c-60.478,4.23) -59.876,3.804 ; C61.1@-60.331,3.162 C4_drivermotor1.1@-59.21,4.743 -59.505,5.038 _drivermotor1.15@-59.505,8.894 ; C61.1@-59.97,3.231 cw(c-59.115,3.377) -59.823,3.879 ; _drivermotor1.15@-59.811,8.588 cw(c-60.549,7.849) -59.505,7.849 cw(c-58.461,7.849) _drivermotor1.15@-59.199,8.588 ; -59.736,4.001 cw(c-59.073,3.532) C4_drivermotor1.1@-59.21,4.332 ; -59.728,4.012 ccw(c-60.375,4.471) C4_drivermotor1.1@-59.594,4.604 ; -59.505,6.474 ccw(c-57.508,6.474) C4_drivermotor1.1@-58.92,5.062 ; 23.139,-44.472 cw(c24.442,-44.472) C21.2@23.521,-43.551 ; 23.139,-44.365 cw(c24.426,-44.365) C21.2@23.516,-43.455 ; C21.2@23.357,-43.245 23.139,-43.462 23.139,-44.958 24.867,-46.685
  Top Layer w0.7: -55.27,23.546 BL1_drivermotor1.7@-49.706,20.098 ; -52.426,-36.5 -52.426,-36.449 v1(-49.428,-33.452) ; v1@-49.713,-33.452 cw(c-50.401,-33.452) -49.915,-33.938 cw(c-49.428,-34.425) v1@-49.428,-33.737 ; v1@-49.428,-33.167 ccw(c-49.428,-32.398) -48.885,-32.942 ; v1@-49.412,-33.468 BL1_drivermotor2.7@-47.192,-31.248 ; BL1_drivermotor3.7@45.574,-32.841 50.868,-38.134 ; BL1_drivermotor4.7@50.688,19.018 56.781,22.897
  Top Layer w0.8: C61.1@-60.331,3.162 C61.1@-60.325,3.15 ; v1@5.486,-43.688 6.837,-42.338 U7.1@19.095,-42.338 20.039,-43.282 C21.2@23.266,-43.282 ; 16.94,-42.338 ccw(c16.94,-39.876) U7.1@18.681,-41.617 ; 17.164,-42.338 ccw(c17.164,-40.406) U7.1@18.53,-41.772 ; 17.92,-42.124 cw(c18.491,-43.112) U7.1@18.786,-42.01 ; U7.1@19.082,-41.783 ccw(c20.389,-41.783) U7.1@19.465,-42.707 ; U7.1@19.661,-42.762 ccw(c20.915,-41.508) 20.915,-43.282 ; C21.2@22.6,-43.282 cw(c22.6,-44.001) C21.2@23.109,-43.492 ; C21.2@22.602,-43.282 ccw(c22.602,-42.541) C21.2@23.126,-43.065 ; 24.867,-46.685 29.997,-46.685 32.715,-43.967
  Top Layer w1: _drivermotor2.15@-37.821,-43.434 -37.795,-43.459 -33.604,-43.459 -31.725,-41.58 v1(-31.471,-41.58) ; _drivermotor2.15@-37.681,-43.767 cw(c-36.939,-44.51) _drivermotor2.15@-36.939,-43.459 ; v1@-37.059,-30.48 -32.103,-30.48 C4_drivermotor2.1@-30.237,-32.346 ; kick1.2@-33.455,-49.756 -33.455,-49.508 -30.568,-46.62 C28.2@-26.808,-46.62 ; kick1.2@-33.455,-48.756 ccw(c-33.455,-46.94) -32.171,-48.224 ; kick1.2@-32.455,-49.756 cw(c-29.442,-49.756) -31.573,-47.625 ; -32.135,-41.99 cw(c-31.471,-42.654) v1@-31.471,-41.715 ; v1@-31.547,-41.504 -26.873,-36.83 -25.933,-36.83 -24.917,-36.83 U5.1@-22.682,-39.065 ; C28.2@-26.429,-47.028 -13.818,-59.639 ; -23.518,-38.229 ccw(c-22.377,-37.088) U5.1@-22.377,-38.702 ; -23.141,-38.606 cw(c-23.958,-39.423) U5.1@-22.803,-39.423 ; D5.2@-13.411,-68.986 -12.548,-69.85 D8.2@-7.671,-69.85 ; D5.2@-13.411,-68.478 -13.411,-59.207 -9.84,-55.636 C25.1@-4.496,-55.636 ; D5.2@-13.27,-68.904 ccw(c-10.986,-66.621) -10.986,-69.85 ; -8.66,-69.85 ccw(c-8.66,-68.742) D8.2@-7.877,-69.526 ; D8.2@-7.671,-69.861 D8.2@-7.671,-69.85 ; D8.2@-7.671,-69.632 D8.2@-7.671,-69.85 ; D8.2@-7.465,-69.526 ccw(c-6.681,-68.742) -6.681,-69.85 ; C26.2@-4.064,-44.399 -4.064,-41.453 -2.041,-41.453 U6.1@-2.041,-38.303 ; -4.064,-41.897 ccw(c-1.153,-41.897) C26.2@-3.211,-43.955 ; -2.925,-55.636 ccw(c-2.925,-54.378) D7.1@-1.786,-54.91 ; D7.1@-2.692,-54.487 cw(c-4.496,-53.645) C25.1@-4.496,-55.636 ; D7.1@-2.652,-54.849 cw(c-3.125,-55.214) -2.703,-55.636 ; D7.1@-1.953,-54.658 -1.194,-53.899 U9.3@-1.194,-49.708 -1.143,-46.406 ; D7.1@-1.822,-54.388 ccw(c-3.339,-52.871) -1.194,-52.871 ; D7.1@-1.727,-54.661 -2.703,-55.636 ; 4.118,-56.233 ccw(c3.318,-55.433) C22.1@4.449,-55.433 ; C22.1@4.826,-55.524 2.997,-57.353 -2.779,-57.353 C25.1@-4.496,-55.636 ; R20.1@10.922,-67.219 10.922,-69.85 ; 12.663,-69.024 ccw(c11.95,-68.311) D3.2@12.958,-68.311 ; D3.2@13.208,-68.478 11.836,-69.85 10.922,-69.85 ; D3.2@13.31,-68.161 ccw(c13.336,-65.863) 14.961,-67.488 ; D3.2@13.664,-68.353 14.096,-68.353 14.961,-67.488 ; Battery1.2@28.703,-53.441 ccw(c26.996,-55.148) 26.996,-52.733 ccw(c26.996,-50.319) Battery1.2@28.703,-52.026 ; Battery1.2@29.41,-52.733 23.543,-52.733 14.961,-61.316 14.961,-67.488 ; v1@30.226,-41.427 32.8,-44.001 _drivermotor3.8@38.015,-44.001 ; v1@48.768,-11.938 56.718,-19.888 56.718,-21.869 _drivermotor3.15@55.626,-22.962 ; C1.1@60.032,-18.096 v1@61.722,-19.787 ; D8.2@-7.671,-69.85 10.922,-69.85 ; C25.1@-4.496,-55.636 -2.703,-55.636
  Top Layer w1.5: C23.1@-9.358,-43.116 -7.695,-41.453 -4.064,-41.453 -2.718,-41.453 -1.118,-43.053 -1.118,-46.66 ; C23.1@-8.857,-42.615 cw(c-7.01,-44.462) FB?.2@-7.01,-41.85 ; -8.53,-42.287 cw(c-6.934,-43.883) FB?.2@-6.934,-41.627 ; -8.424,-42.229 ccw(c-8.967,-40.203) FB?.2@-7.151,-41.252 ; FB?.2@-6.692,-41.082 ccw(c-5.797,-40.186) -5.797,-41.453 ; v1(41.377,31.953) 44.577,31.441 45.129,31.353 45.187,31.344 ; 43.284,31.648 cw(c42.992,29.82) _drivermotor4.15@44.492,30.906 cw(c45.439,29.915) 45.656,31.269
  Top Layer w2: -65.481,4.597 -65.48,5.614 -65.476,8.387 -48.301,34.538 ; -65.476,4.597 -65.476,-23.424 -60.554,-28.346 ; -65.329,5.613 v1(-61.468,5.563) ; -63.432,11.346 _drivermotor1.15@-59.615,8.76 ; _drivermotor2.8@-58.962,-25.899 -60.969,-27.906 -60.539,-28.332 -52.452,-36.348 ; -52.363,-36.437 -41.486,-47.219 ; _drivermotor1.8@-46.296,33.057 -48.301,34.538 ; _drivermotor2.15@-37.858,-43.59 -41.486,-47.219 ; kick1.2@-33.455,-49.756 -38.992,-49.756 -41.508,-47.24 -41.486,-47.219 ; Battery1.2@29.764,-52.38 ccw(c32.572,-49.572) 32.572,-53.543 ; Battery1.2@30.452,-53.439 30.556,-53.543 35.433,-53.543 41.529,-47.447 ; _drivermotor3.8@38.015,-44.001 41.41,-47.396 41.453,-47.396 ; 40.631,46.33 -40.665,46.33 -48.301,34.538 ; 40.69,46.27 49,34.2 49.064,34.107 ; 41.516,-47.485 50.868,-38.134 60.905,-28.097 ; _drivermotor4.15@44.519,30.925 45.129,31.353 45.163,31.377 48.752,33.893 ; 48.946,34.163 56.781,22.897 56.784,22.893 64.683,11.419 ; _drivermotor3.15@55.787,-22.978 60.905,-28.097 ; _drivermotor4.8@61.716,9.419 64.111,11.025 ; v1@61.747,-19.837 66.599,-19.787 ; 64.694,11.405 66.599,8.636 66.599,-19.787 ; 60.905,-28.097 66.599,-22.403 66.599,-19.787
  Bottom Layer w0.6: C24.2@-29.845,-43.053 -29.845,-43.459 U10.5@-28.403,-44.902 ; C24.2@-29.639,-43.084 ccw(c-28.235,-43.084) -29.228,-44.077 ; C24.2@-29.485,-43.307 ccw(c-28.247,-43.307) U10.5@-29.122,-44.182 ; U10.5@-28.91,-44.729 ccw(c-29.719,-44.729) -29.147,-44.158 ccw(c-28.575,-43.586) U10.5@-28.575,-44.394 ; U10.5@-28.575,-45.064 cw(c-28.575,-45.751) U10.5@-28.09,-45.265 ; U10.5@-28.403,-44.888 U10.5@-28.403,-44.902 ; U10.5@-28.24,-44.729 ccw(c-27.309,-44.729) U10.5@-27.967,-45.388 ; -27.379,-45.976 cw(c-28.038,-46.634) v1@-27.107,-46.634 ; -27.257,-46.098 ccw(c-26.772,-45.613) v1@-26.772,-46.299 ; v1@-26.746,-46.609 -28.403,-44.952 U10.5@-28.403,-44.902
  Bottom Layer w0.635: v1@23.237,-42.984 U8.5@24.561,-41.66 ; v1@23.567,-42.781 23.567,-43.233 23.622,-43.179 v1@23.622,-43.028 ; v1@23.609,-43.231 cw(c25.103,-43.231) U8.5@24.047,-42.174 ; C20.2@28.97,-42.584 28.97,-42.559 C5.1@30.215,-41.314 ; C20.2@29.041,-42.181 ccw(c29.041,-41.44) 29.565,-41.964 ; C20.2@29.373,-42.514 cw(c30.237,-42.514) 29.626,-41.903 ; C20.2@29.436,-42.093 cw(c30.277,-42.934) C5.1@30.277,-41.745 ; C5.1@29.811,-41.385 cw(c29.009,-41.385) 29.576,-41.953 cw(c30.144,-42.52) C5.1@30.144,-41.718
  Bottom Layer w1: v1(-49.428,-33.452) -46.457,-30.48 v1@-37.059,-30.48 ; C6.1@-31.457,-41.566 -29.969,-43.053 C24.2@-29.845,-43.053 ; v1@-22.276,-38.887 -21.093,-37.705 C13.1@-21.017,-37.705 ; C12.1@-22.262,-36.46 C13.1@-21.017,-37.705 ; C13.1@-20.865,-37.705 C13.1@-21.017,-37.705 ; -20.069,-38.653 ccw(c-19.389,-37.972) C11.1@-19.389,-38.935 ; C11.1@-19.202,-39.141 -19.581,-39.141 C13.1@-21.017,-37.705 ; U9.5@-4.594,-49.708 -4.594,-48.028 -3.785,-47.219 -1.727,-47.219 -1.118,-47.828 U9.3@-1.118,-49.632 ; C15.1@-2.576,-33.894 C16.1@-2.576,-32.207 ; C14.1@-2.55,-38.445 C15.1@-2.55,-34.036 ; -2.55,-37.529 ccw(c-1.001,-37.529) C14.1@-2.097,-38.624 ; -2.55,-36.502 ccw(c-0.282,-36.502) C14.1@-1.886,-38.106 ; C14.1@-2.203,-39.216 ccw(c-1.294,-39.216) v1@-1.937,-39.859 ; C14.1@-2.203,-39.062 cw(c-1.121,-39.062) C14.1@-1.886,-38.297 ; C14.1@-2.203,-38.83 -2.203,-40.19 -1.397,-40.996 2.642,-40.996 v1(5.41,-43.764) 5.512,-43.866 R23.1@5.512,-47.066 ; v1@-1.897,-39.954 ccw(c-0.59,-39.954) -1.514,-40.878 ; C18.1@18.834,-37.808 17.501,-39.141 17.501,-40.437 v1(18.847,-41.783) C17.1@18.898,-41.834 ; _drivermotor4.15@44.471,30.895 44.501,30.836 _drivermotor4.15@44.552,30.836
  other v1: -26.772,-46.634 -28.575,-44.729 -29.82,-43.307 23.292,-43.231 30.277,-41.427 -2.032,-39.954 -22.377,-38.837 -1.981,-38.202 -2.565,-33.858 -2.667,-32.207 -37.084,-30.505 61.697,-19.812 48.87,-12.09
  other v3: -6.934,-41.377
BUSY: U12.57
BUZ: R1.1 U2.40 | length 39.4
  Top Layer w0.305: -17.577,22.758 -17.577,22.2 -11.627,16.25 U2.40@-9.225,16.25 ; U2.40@-9.911,16.163 ccw(c-10.121,15.954) -10.121,16.25 ccw(c-10.121,16.546) U2.40@-9.911,16.336
  Top Layer w0.508: v1@-31.064,31.775 -27.203,35.636 -20.371,35.636 -17.577,32.842 -17.577,22.657 ; v1@-30.683,31.549 cw(c-29.218,31.549) -30.254,32.586
  other v1: -31.064,31.549
CCLK: U12.72 U13.3 | length 43.5
  Top Layer w0.254: v2@-10.147,2.177 ccw(c-9.842,2.365) U12.72@-9.842,2.007 ; v2@-10.126,1.825 cw(c-9.842,1.694) U12.72@-9.842,2.007 ; U12.72@-9.842,1.711 U12.72@-9.842,2.007 ; U12.72@-9.841,1.712 ccw(c-10.439,1.25) -10.439,2.007 U12.72@-9.842,2.007
  Top Layer w0.4: v1@-14.224,-28.219 -14.198,-28.245 U13.3@-12.4,-28.245 ; v1@-13.916,-28.629 cw(c-12.991,-29.554) U13.3@-12.991,-28.245 ; v1@-13.916,-28.013 ccw(c-13.356,-27.453) -13.356,-28.245
  Bottom Layer w0.508: -15.438,-27.437 ccw(c-14.224,-26.223) v1@-14.224,-27.94 ; v1@-14.287,-28.384 v1@-14.237,-28.435 ; v1@-14.224,-28.499 -14.376,-28.499 -17.577,-25.298 -17.577,-4.75 -10.897,1.93 v2@-10.465,1.93 ; -11.535,1.292 cw(c-10.465,0.221) v2@-10.465,1.735
  other v1: -14.224,-28.321
  other v2: -10.465,1.981
CE: U2.29 U3.3 | length 11.3
  Top Layer w0.3: U3.3@-6.731,31.293 -5.175,29.737 U2.29@-5.175,23.5 ; U3.3@-6.706,30.492 cw(c-6.706,28.62) -5.382,29.944 ; U3.3@-6.706,30.792 cw(c-6.706,29.644) -5.894,30.456 ; U2.29@-5.263,24.188 ccw(c-5.477,24.401) -5.175,24.401 ccw(c-4.873,24.401) U2.29@-5.086,24.188
CLK: OSC-FPGA.3 U12.127 | length 23.1
  Top Layer w0.203: v4(-1.092,-20.904) -1.245,-20.904 -0.842,-20.502 ; v4@-1.092,-20.606 ccw(c-1.092,-20.253) -0.843,-20.503 ; v4@-0.856,-20.722 cw(c-0.724,-20.62) -0.842,-20.502 ; U12.127@-0.842,-19.339 -0.842,-20.502
  Bottom Layer w0.508: OSC-FPGA.3@-15.973,-24.638 -12.979,-24.638 -7.722,-19.38 -2.769,-19.38 -1.245,-20.904 v4(-1.092,-20.904) ; OSC-FPGA.3@-15.516,-25.095 cw(c-14.414,-26.198) -14.414,-24.638 cw(c-14.414,-23.078) OSC-FPGA.3@-15.516,-24.181 ; -1.602,-20.547 ccw(c-1.092,-20.038) v4@-1.092,-20.758
CLK_PAR: U2.62 U12.46 | length 7.3
  Top Layer w0.203: U2.62@2.703,7.477 cw(c2.482,7.256) 2.794,7.256 ; 2.794,7.106 cw(c3.319,7.106) U2.62@2.948,7.477 ; U2.62@2.825,8.2 2.794,8.168 2.794,6.858 3.158,6.494 U12.46@3.158,1.711
CSN: U2.30 U3.4 | length 6.9
  Top Layer w0.305: U3.4@-6.756,28.753 U3.4@-6.706,28.702 -5.975,27.971 ; U3.4@-6.465,28.025 cw(c-6.253,27.693) -5.975,27.971 ; U3.4@-6.258,28.402 ccw(c-5.902,28.402) -6.154,28.15 ; U2.30@-6.061,24.186 ccw(c-6.271,24.396) -5.975,24.396 ccw(c-5.679,24.396) U2.30@-5.888,24.186 ; U2.30@-5.975,23.5 -5.975,27.971
CUR_KICK: R39.2 U10.7 | length 15.4
  Top Layer w0.6: R39.2@-25.932,-38.683 -25.932,-39.219 v1@-23.431,-41.719 ; R39.2@-25.512,-38.754 ccw(c-23.373,-38.754) -24.885,-40.266 ; -24.034,-41.117 cw(c-24.649,-41.732) v1@-23.779,-41.732 ; -23.973,-41.178 ccw(c-23.444,-40.65) v1@-23.444,-41.397
  Bottom Layer w0.6: U10.7@-26.746,-42.977 -25.349,-44.374 -23.749,-44.374 -22.555,-43.18 -22.555,-42.621 v1(-23.444,-41.732) ; v1@-23.444,-42.067 cw(c-23.444,-42.876) -22.872,-42.304 cw(c-22.3,-41.732) v1@-23.109,-41.732
CUR_KICK_O: R38.1 U2.5 | length 95.1
  Top Layer w0.305: U2.5@6.075,13.05 12.364,13.05 v1(12.497,13.183) ; U2.5@6.762,12.963 cw(c6.971,12.754) 6.971,13.05 cw(c6.971,13.346) U2.5@6.762,13.136 ; 11.011,13.05 ccw(c11.011,14.669) v1@12.156,13.524 ; 11.653,13.05 cw(c11.653,12.339) v1@12.156,12.841 ; 11.746,13.05 ccw(c11.746,13.933) v1@12.371,13.308
  Bottom Layer w0.6: R38.1@-25.972,-38.595 -25.972,-38.418 -24.155,-36.601 -24.155,2.489 -13.538,13.106 12.243,13.106 12.497,13.36 v1(12.497,13.183) ; R38.1@-25.914,-39.313 R38.1@-25.914,-38.665 ; R38.1@-25.635,-38.595 cw(c-24.396,-38.595) -25.272,-37.718 ; 11.504,13.106 ccw(c11.504,14.175) v1@12.26,13.419
CUR_M1_O: R12.1 U2.8 | length 52.9
  Top Layer w0.305: U2.8@6.075,15.45 6.132,15.392 8.941,15.392 v1(9.144,15.596) ; U2.8@6.762,15.536 ccw(c7.109,15.884) 7.109,15.392 ; 7.488,15.392 ccw(c7.488,17.251) v1@8.803,15.937 ; 8.224,15.392 ccw(c8.224,16.515) v1@9.018,15.721 ; 8.469,15.392 cw(c8.469,14.921) v1@8.803,15.254
  Bottom Layer w0.508: R12.1@-28.664,24.655 cw(c-29.369,23.95) -28.372,23.95 ; R12.1@-28.467,24.991 R12.1@-28.372,24.895 ; -28.372,24.008 cw(c-27.457,24.008) R12.1@-28.104,24.655 ; R12.1@-28.372,24.968 -28.372,21.59 -22.631,15.85 8.89,15.85 v1@9.296,15.443 ; 7.611,15.85 cw(c7.611,14.063) v1@8.875,15.326
CUR_M2_O: R40.1 U2.7 | length 78.6
  Top Layer w0.305: U2.7@6.075,14.65 7.474,14.65 7.874,14.249 10.795,14.249 v1(10.947,14.402) ; U2.7@6.762,14.563 cw(c6.971,14.354) 6.971,14.65 cw(c6.971,14.946) U2.7@6.762,14.736 ; 9.414,14.249 ccw(c9.414,15.935) v1@10.606,14.743 ; v1@10.606,14.061 ccw(c10.15,13.605) 10.15,14.249 ccw(c10.15,15.199) v1@10.822,14.528
  Bottom Layer w0.508: R40.1@-46.801,-9.841 -44.969,-9.841 -20.879,14.249 10.744,14.249 10.897,14.402 v1(10.947,14.402) ; R40.1@-46.45,-10.05 cw(c-45.945,-10.556) R40.1@-45.945,-9.841 ; R40.1@-46.45,-9.49 ccw(c-45.603,-8.644) -45.603,-9.841 ; 9.66,14.249 ccw(c9.66,15.69) v1@10.678,14.671
CUR_M3_O: R36.1 U2.3 | length 55
  Top Layer w0.305: U2.3@6.075,11.45 9.353,11.45 v1(10.287,10.516) ; U2.3@6.762,11.363 cw(c6.971,11.154) 6.971,11.45 cw(c6.971,11.746) U2.3@6.762,11.536 ; v1@9.804,10.516 ccw(c8.639,10.516) 9.463,11.339 ccw(c10.287,12.163) v1@10.287,10.998
  Bottom Layer w0.508: v1@10.274,10.503 23.8,-3.023 23.8,-27.252 R36.1@25.338,-28.79 ; v1@10.287,10.135 cw(c10.287,9.276) 10.894,9.883 ; v1@10.668,10.516 ccw(c11.649,10.516) 10.955,9.822 ; 24.346,-27.798 ccw(c25.369,-26.775) R36.1@25.369,-28.221
CUR_M4_O: R42.1 U2.4 | length 51.7
  Top Layer w0.305: U2.4@6.075,12.25 10.839,12.25 ; U2.4@6.762,12.163 cw(c6.971,11.954) 6.971,12.25 cw(c6.971,12.546) U2.4@6.762,12.336 ; v1@11.03,11.659 ccw(c10.357,11.768) 10.839,12.25 ; v1@11.076,11.801 ccw(c10.883,11.899) 11.036,12.052 ; v1@11.287,12.012 cw(c11.189,12.205) 11.036,12.052 ; v1@11.429,12.059 cw(c11.321,12.731) 10.839,12.25 ; 10.839,12.25 11.036,12.052
  Bottom Layer w0.508: v1@11.252,11.582 v1(11.506,11.582) ; v1@11.316,11.392 24.663,-1.956 45.06,-1.956 R42.1@46.38,-3.277 ; v1@11.887,11.582 ccw(c13.727,11.582) 12.426,10.282 ; 45.483,-2.38 ccw(c46.329,-1.534) R42.1@46.329,-2.73 ; 45.723,-2.62 cw(c45.217,-3.126) R42.1@45.933,-3.126
CUR_MAIN: R44.2 U8.7 | length 4.3
  Bottom Layer w0.6: U8.7@26.357,-43.456 27.675,-42.139 R44.2@27.675,-41.439 ; U8.7@26.753,-43.06 ccw(c25.202,-41.509) R44.2@27.395,-41.509